# Altium PCB PCB+copy.pcbdoc
Units mil, origin at the board's own origin, x right, y up, seen from the top; angles counter-clockwise.
Board outline 5217.62 x 3650 mil, 2 copper layers (Top Layer, Bottom Layer); 35 components, 62 nets, 192 pads, 16 vias.
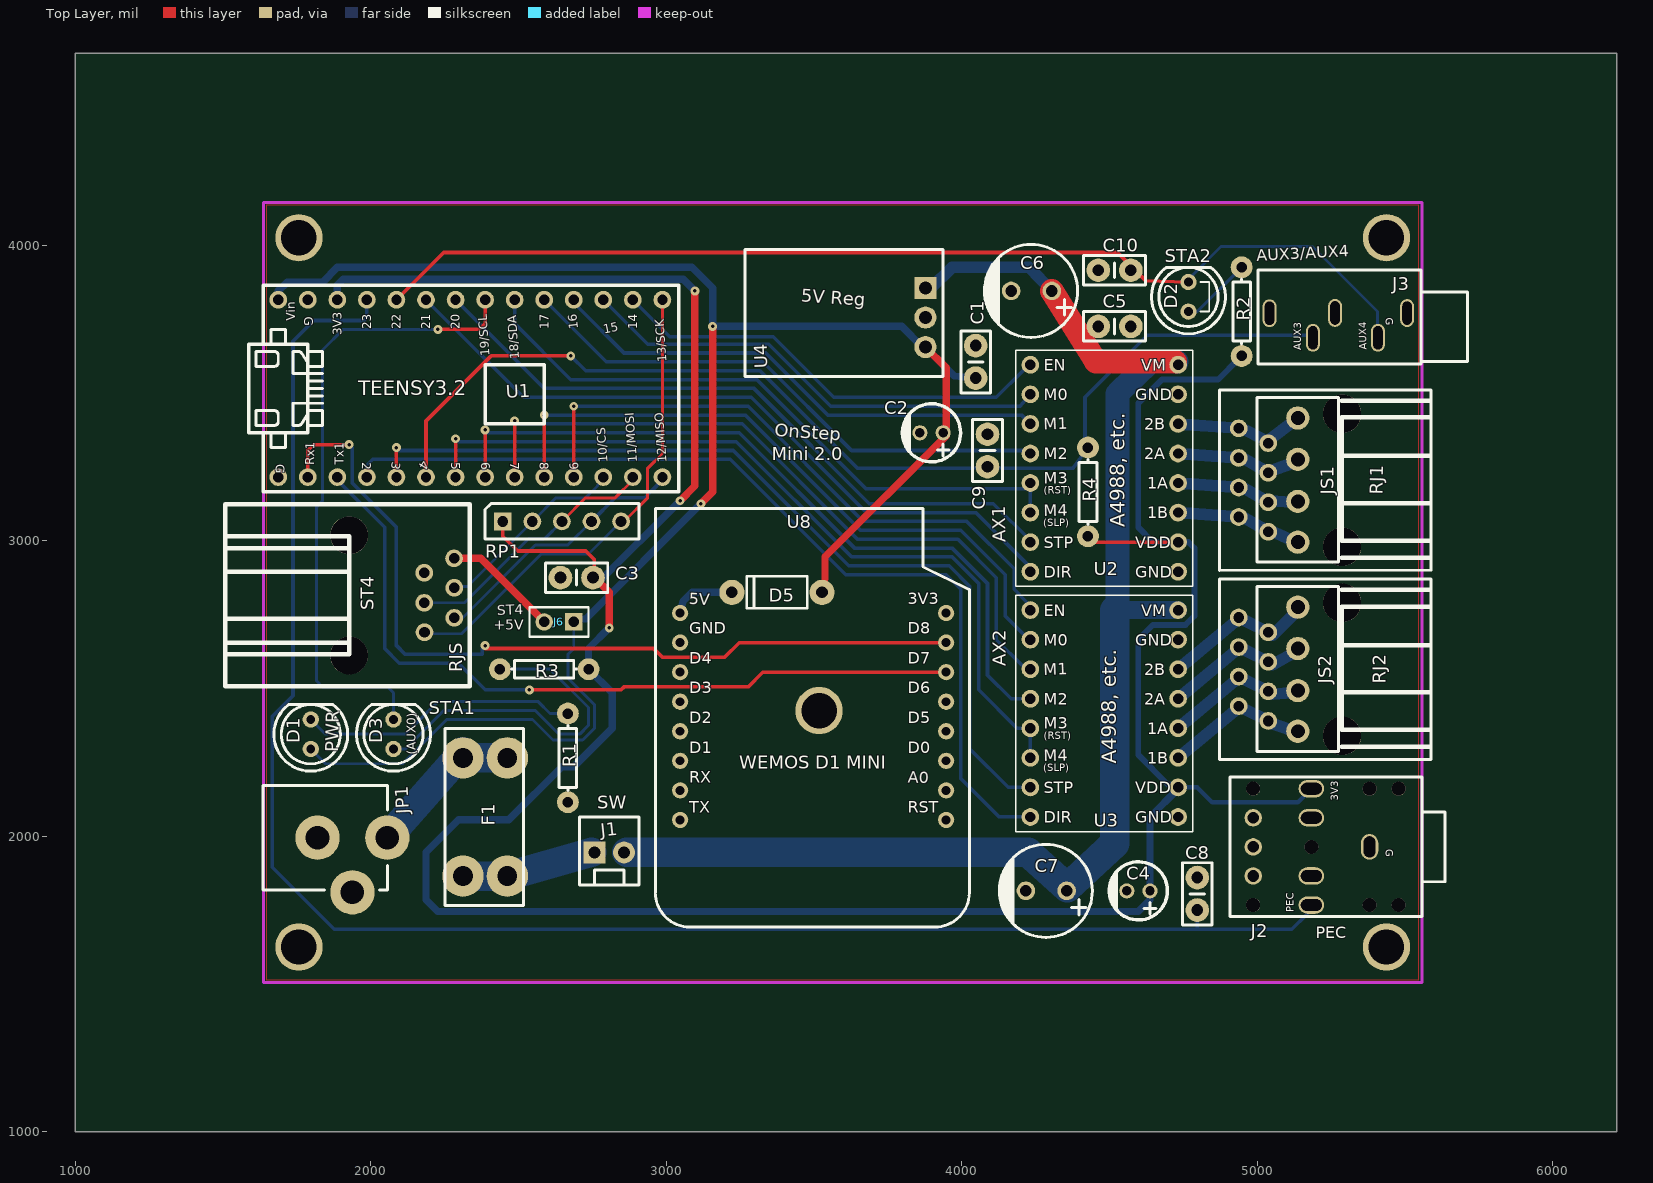
[diagram p0: Top Layer view]
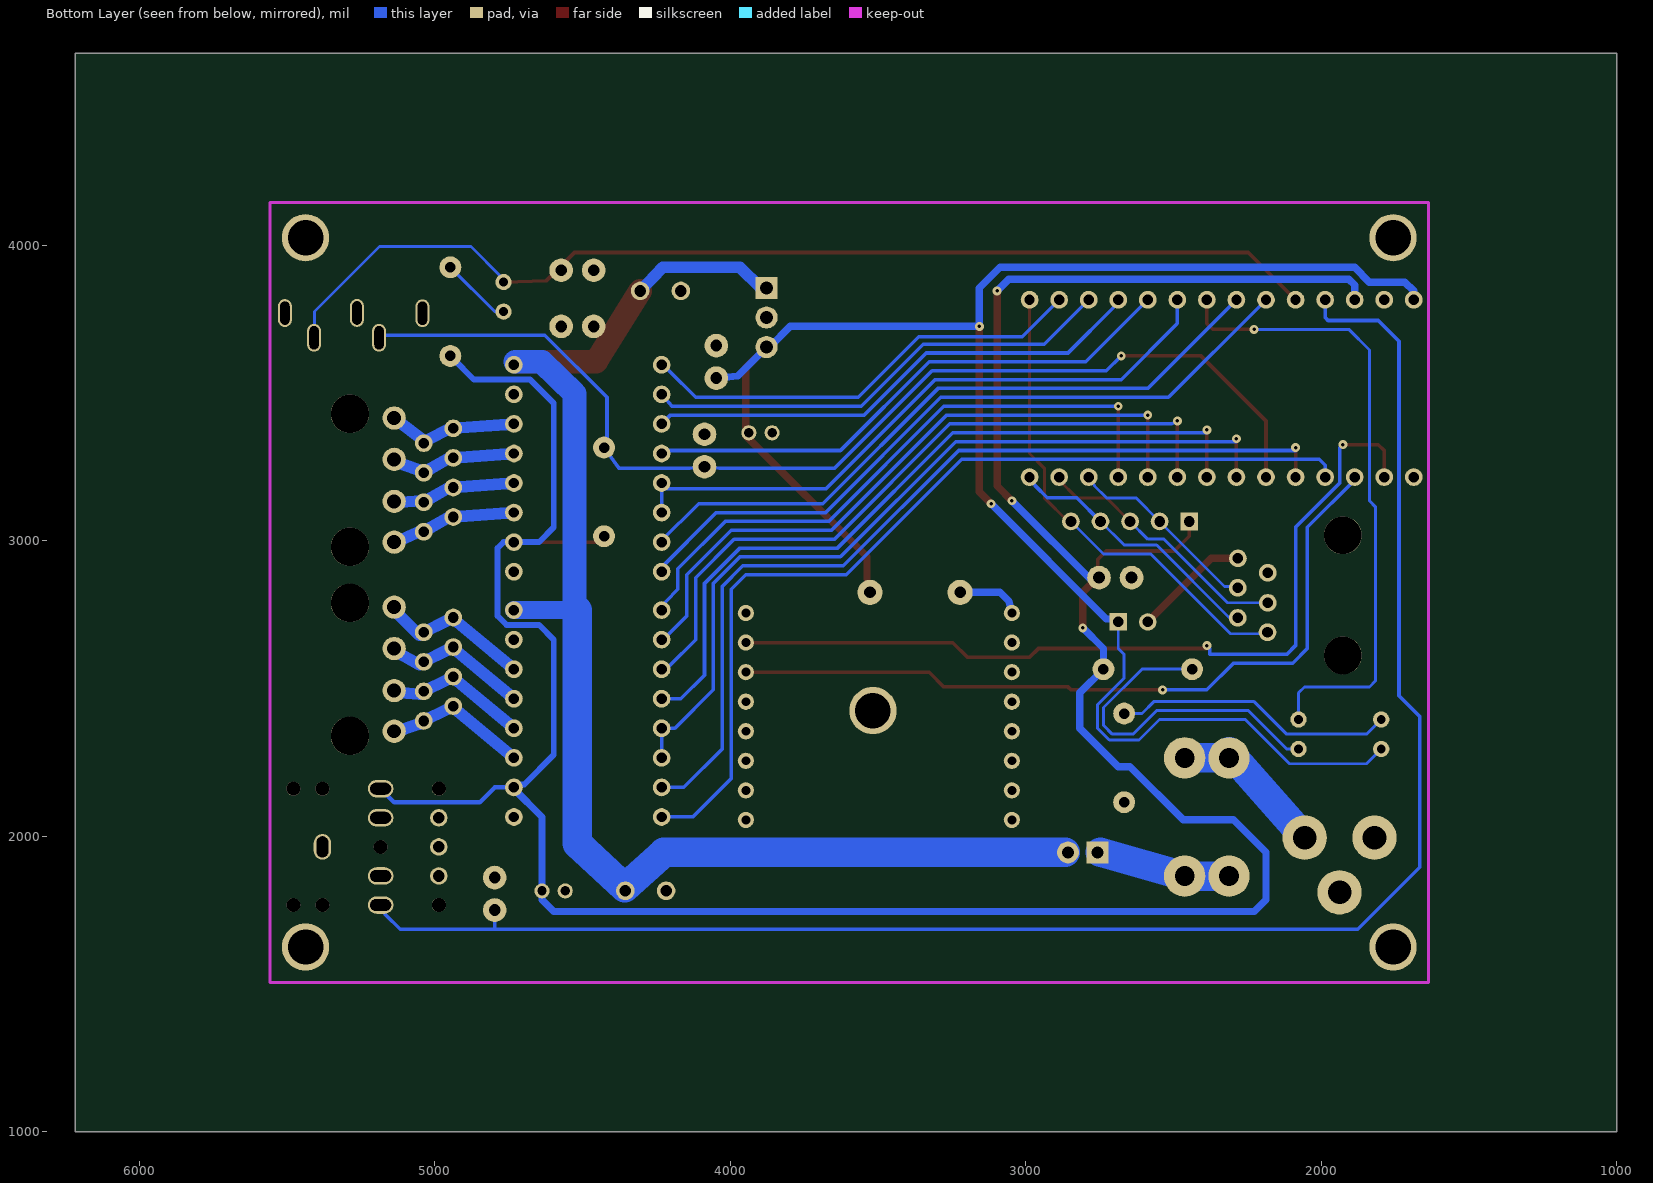
[diagram p1: Bottom Layer view, seen from below]

## Layer stack, top to bottom
Top Layer: signal copper (thickness not stored)
Dielectric: dielectric 12.6, FR-4, Dk 4.8
Bottom Layer: signal copper (thickness not stored)

## Board outline
6217.62,1000 1000,1000 1000,4650 6217.62,4650

## Components (designator, comment, footprint, x,y, rotation, side; value= is the part's Value field where it differs from the comment)
C1 "0.1UF-100V-20%(PTH)" CAP-PTH-SMALL-KIT 4047.62,3605 r90 top
C2 "47uF" CAP-D5.0XF2.0 3937.62,3365 r180 top
C3 "0.1UF-100V-20%(PTH)" CAP-PTH-SMALL-KIT 2697.62,2875 r180 top
C4 "47uF" CAP-D5.0XF2.0 4637.62,1815 r180 top
C5 "0.33UF-50V-20%(PTH)" CAP-PTH-SMALL-KIT 4517.62,3725 r0 top
C6 "100uF" CAP-D8.0XF3.5 4167.62,3845 r270 top
C7 "100uF" CAP-D8.0XF3.5 4217.62,1815 r270 top
C8 "0.1UF-100V-20%(PTH)" CAP-PTH-SMALL-KIT 4797.62,1805 r270 top
C9 "0.1UF-100V-20%(PTH)" CAP-PTH-SMALL-KIT 4087.62,3305 r90 top
C10 "0.1UF-100V-20%(PTH)" CAP-PTH-SMALL-KIT 4517.62,3915 r180 top
D1 "LED3/5mm" LED3/5MM 1797.72,2344.9 r90 top
D2 "LED3/5mm" LED3/5MM 4767.62,3824.9 r90 top
D3 "LED3/5mm" LED3/5MM 2077.62,2344.9 r90 top
D5 "1N4001" DO-41 3377.62,2825 r180 top
F1 "FUSE" FUSEHOLDER_MINI_BLADE 2387.62,2065 r270 top
J1 "MOLEX KK 1X2" "MOLEX KK 1X2" 2757.62,1945 r0 top
J2 "SJ-3566/3.5MM" "CUI SJ-3566" 5557.62,2200 r270 top
J3 "PJ-325M/3.5MM" AUDIO-PJ325 5507.62,3770 r270 top
J6 "1x2 Header" HDR1X2 2687.62,2725 r180 top
JP1 "POWER_JACKPTH" POWER_JACK_PTH 1517.62,1995 r270 top
JS1 "4POS_SCREW_TERMINAL_3.5MM" 4POS_SCREW_TERMINAL_3.5MM 5137.62,2995 r90 top
JS2 "4POS_SCREW_TERMINAL_3.5MM" 4POS_SCREW_TERMINAL_3.5MM 5137.62,2355 r90 top
R1 "4.7KΩ" AXIAL-0.3 2667.62,2415 r270 top
R2 "3.3KΩ(3302)" AXIAL-0.3 4947.62,3625 r90 top
R3 "3.3KΩ(3302)" AXIAL-0.3 2737.62,2565 r180 top
R4 "2k" AXIAL-0.3 4427.62,3315 r270 top
RJ1 "5555164-1" 5555164-1 4987.62,3204.95 r90 top
RJ2 "5555164-1" 5555164-1 4987.62,2564.95 r90 top
RJS "5555165-1" 6P6C 1927.62,2815 r270 top
RP1 "Bussed Resistor Network 5 Pin" "4 RESISTOR ARRAY" 2447.62,3065 r90 top
U1 "TEENSY_3.2_BASIC" TEENSY_3.2_BASIC 2287.62,3515 r0 top
U2 "A4988, etc." "GENERIC STEPPER MOTOR DRIVER CARRIER" 4177.62,2845 r0 top
U3 "A4988, etc." "GENERIC STEPPER MOTOR DRIVER CARRIER" 4177.62,2015 r0 top
U4 "5V Reg" "OKI78SR5/1.5W36C HOR" 3877.62,3755 r90 top
U8 "WEMOS D1 MINI" WEMOS_D1_MINI 3947.62,2755 r180 top

## Footprints (in the part's own frame and the unit in brackets; to place one, negate y for a bottom-side part, rotate by r counter-clockwise, add the part's x,y. Pads: shape width x height; smd on the part's side, far side on the other; paste and mask are expansions set on the pad)
"4 RESISTOR ARRAY" [mil]
  rect 60x60 hole 36: 1(0,0)
  round 60 hole 36: 2(0,-100) 3(0,-200) 4(0,-300) 5(0,-400)
  silkscreen extent -60,-460 60,60
4POS_SCREW_TERMINAL_3.5MM [mm]
  round 2 hole 1.2: 1(0,0) 2(3.5,0) 3(7.112,0) 4(10.668,0)
  silkscreen extent -1.72,-3.5 12.45,3.5
6P6C [mil]
  round 60 hole 36: 1(-125,355) 2(-76.2,254) 3(-25.4,355.6) 4(25.4,254) 5(76.2,355.6) 6(125,255)
  round 128 hole 128: ""(-203.2,0) ""(203.2,0)
  silkscreen extent -308,-420 308,408
5555164-1 [mil]
  round 60 hole 36: 1(-175,-49.95) 2(-125,49.95) 3(-75,-49.95) 4(-25,49.95) 5(25,-49.95) 6(75,49.95) 7(125,-49.95) 8(175,49.95)
  round 129.92 hole 129.92 unplated: ""(-225.6,-299.75) ""(224.4,-299.75)
  silkscreen extent -305,-600 305,115
AUDIO-PJ325 [mm]
  oval 2.4x1.2 hole 0.8 slot 1.999 at 0 deg: 1(0,0) 3(2.12,-8.103) 5(2.12,-2.515)
  oval 2.4x1.2 hole 0.8 slot 2.001 at 0 deg: 2(-0.012,-6.198) 4(0.014,-11.825)
  silkscreen extent -3.72,-12.81 4.38,5.21
AXIAL-0.3 [mil]
  round 74 hole 35.4: 1(0,0) 2(300,0)
  silkscreen extent 40,-30 260,30
CAP-D5.0XF2.0 [mm]
  round 1.3 hole 0.8: 1(0,0) 2(2,0)
  silkscreen extent -1.5,-2.5 3.5,2.5
CAP-D8.0XF3.5 [mm]
  round 1.6 hole 1: 1(0,3.5) 2(0,0)
  silkscreen extent -4,-2.29 4,5.71
CAP-PTH-SMALL-KIT [mil]
  round 80 hole 40: 1(-55,0) 2(55,0)
  silkscreen extent -105,-50 105,50
"CUI SJ-3566" [mm]
  oval 2.2x1.5 hole 1 slot 1.8 at 0 deg: 1(6,-4.5)
  oval 1.5x2.2 hole 1 slot 1.8 at 90 deg: 2(1,-9.5) 3(11,-9.5) 10(3.5,-9.5) 11(8.5,-9.5)
  round 1.5 hole 1: 4(8.5,-14.5) 5(6,-14.5) 6(3.5,-14.5)
  round 1.2 hole 1.2 unplated: ""(1,-2) ""(1,-4.5) ""(1,-14.5) ""(6,-9.5) ""(11,-2) ""(11,-4.5) ""(11,-14.5)
  silkscreen extent 0,-16.5 12,2
DO-41 [mil]
  round 85 hole 39.37: 1(-150,0) 2(155,0)
  silkscreen extent -100,-54 105,54
FUSEHOLDER_MINI_BLADE [mil]
  round 140 hole 67: 1(-200,-75) 1(-200,75) 2(200,-75) 2(200,75)
  silkscreen extent -300,-135 300,130
"GENERIC STEPPER MOTOR DRIVER CARRIER" [mil]
  round 60 hole 35: 1(55,750) 2(55,650) 3(55,550) 4(55,450) 5(55,350) 6(55,250) 7(55,150) 8(55,50) 9(555,50) 10(555,150) 11(555,250) 12(555,350) 13(555,450) 14(555,550) 15(555,650) 16(555,750)
  silkscreen extent 5,0 605,800
HDR1X2 [mil]
  rect 59x59 hole 36: 1(0,0)
  round 59 hole 36: 2(100,0)
  silkscreen extent -50,-50 150,50
LED3/5MM [mil]
  round 55 hole 30: 1(-50,0) 2(50,0)
  silkscreen extent -125,-125 100,125
"MOLEX KK 1X2" [mil]
  rect 74x74 hole 40: 1(0,0)
  round 74 hole 40: 2(100,0)
  silkscreen extent -50,-110 150,120
"OKI78SR5/1.5W36C HOR" [mil]
  rect 75x75 hole 44: 1(100,0)
  round 75 hole 44: 2(0,0) 3(-100,0)
  silkscreen extent -200,-60 230,610
POWER_JACK_PTH [mil]
  round 150 hole 80: GND(0,303) GNDBREAK(185,421) PWR(0,539)
  silkscreen extent -177,118 177,539
TEENSY_3.2_BASIC [mil]
  round 60 hole 35: 0RX(-500,-300) 1TX(-400,-300) 2(-300,-300) 3CANTX(-200,-300) 3V3_LO(-400,300) 4CANRX(-100,-300) 5(0,-300) 6(100,-300) 7(200,-300) 8(300,-300) 9CS(400,-300) 10CS(500,-300) 11MOSI(600,-300) 12MISO(700,-300) 13SCK(700,300) 14A0(600,300) 15A1(500,300) 16A2(400,300) 17A3(300,300) 18A4SDA(200,300) 19A5SCL(100,300) 20A6(0,300) 21A7(-100,300) 22A8(-200,300) 23A9(-300,300) AGND(-500,300) GND(-600,-300) VIN(-600,300)
  silkscreen extent -700,-350 755,350
WEMOS_D1_MINI [mil]
  round 55 hole 30: 1(0,700) 2(0,600) 3(0,500) 4(0,400) 5(0,300) 6(0,200) 7(0,100) 8(0,0) 9(900,0) 10(900,100) 11(900,200) 12(900,300) 13(900,400) 14(900,500) 15(900,600) 16(900,700)
  silkscreen extent -79,-354 984,1063

## Free pads (board coordinates)
  round 160 hole 120: GND(1757.62,1625) GND(1757.62,4025) GND(3517.62,2425) GND(5437.62,1625) GND(5437.62,4025)

## Via types
v1: diameter 30, hole 12, Top Layer to Bottom Layer, 16 vias

## Nets (pads, with @x,y where several pads share a name; then routed paths per layer and width w, separated by ;. In a path a pad name is that pad's centre, name@x,y a point inside that pad or via, vN(x,y) a via of type N, cw(c..) or ccw(c..) an arc to the next point about the centre after c; other vN are vias at no path point)
1A_1: JS1.2 RJ1.3 RJ1.4 U2.12 | length 426.2
  Bottom Layer w40: U2.12 RJ1.4 ; RJ1.4@4942.72,3185 RJ1.3@5047.62,3125 ; RJ1.3@5042.62,3135 JS1.2@5142.12,3127.9
1A_2: JS2.2 RJ2.3 RJ2.4 U3.12 | length 475.8
  Bottom Layer w40: U3.12 RJ2.4@4943.22,2539.9 ; RJ2.4@4947.72,2535 RJ2.3@5047.62,2485 ; RJ2.3@5052.12,2480.1 JS2.2@5142.12,2487.9
1B_1: JS1.1 RJ1.1 RJ1.2 U2.11 | length 435.7
  Bottom Layer w40: U2.11 RJ1.2 ; RJ1.2@4942.72,3085 RJ1.1@5047.62,3025 ; RJ1.1@5042.62,3035 JS1.1@5142.12,2990.1
1B_2: JS2.1 RJ2.1 RJ2.2 U3.11 | length 480.3
  Bottom Layer w40: U3.11 RJ2.2@4943.22,2439.9 ; RJ2.2@4947.72,2435 RJ2.1@5047.62,2385 ; RJ2.1@5052.12,2380.1 JS2.1@5142.12,2350.1
2A_1: JS1.3 RJ1.5 RJ1.6 U2.13 | length 432
  Bottom Layer w40: U2.13 RJ1.6 ; RJ1.6@4942.72,3285 RJ1.5@5047.62,3225 ; RJ1.5@5042.62,3235 JS1.3@5142.12,3270.1
2A_2: JS2.3 RJ2.5 RJ2.6 U3.13 | length 488.4
  Bottom Layer w40: U3.13 RJ2.6@4943.22,2639.9 ; RJ2.6@4947.72,2635 RJ2.5@5047.62,2585 ; RJ2.5@5052.12,2580.1 JS2.3@5142.12,2630.1
2B_1: JS1.4 RJ1.7 RJ1.8 U2.14 | length 442
  Bottom Layer w40: U2.14 RJ1.8 ; RJ1.8@4937.72,3385 RJ1.7@5037.62,3335 ; RJ1.7@5032.62,3335 JS1.4@5132.12,3410.1
2B_2: JS2.4 RJ2.7 RJ2.8 U3.14 | length 512.7
  Bottom Layer w40: U3.14 RJ2.8@4943.22,2739.9 ; RJ2.8@4947.72,2735 RJ2.7@5047.62,2685 ; RJ2.7@5052.12,2680.1 JS2.4@5142.12,2770.1
$BoardOutlineNet: 
+5V: C1.1 C2.1 D1.1 D5.1 J6.1 U1.VIN U4.3 | length 6414.1
  Top Layer w25: v1(3117.62,3125) 3157.62,3165 v1(3157.62,3725) ; D5.1@3532.62,2825 3537.62,2875 3537.62,2945 3947.62,3355 C2.1 3947.62,3385 3948.02,3584.6 U4.3
  Bottom Layer w10: D1.1@1797.62,2295 1847.62,2245 2107.92,2245 2257.52,2395 2547.62,2395 2617.62,2325 2717.62,2325 2757.62,2365 2757.62,2445 2667.62,2535 2667.62,2615 2687.62,2635 J6.1
  Bottom Layer w25: U1.VIN 1687.62,3845 1717.62,3875 1837.62,3875 1887.62,3925 3087.62,3925 3157.62,3855 v1(3157.62,3725) 3797.62,3725 3867.62,3655 3897.62,3655 3887.62,3645 3975.42,3557.2 C1.1 ; J6.1 2697.62,2735 2727.62,2735 v1(3117.62,3125)
AUX0: D3.2 U1.19A5SCL | length 2162.1
  Top Layer w12: v1(2227.62,3715) 2367.62,3715 2387.62,3735 U1.19A5SCL
  Bottom Layer w10: D3.2@2077.62,2395 2077.62,2485 2057.62,2505 1837.62,2505 1817.62,2525 1817.62,3115 1837.62,3135 1837.62,3645 1907.62,3715 v1(2227.62,3715)
AUX1: U1.18A4SDA U2.5 U2.6 | length 2177
  Bottom Layer w12: U1.18A4SDA 2487.62,3735 2677.62,3545 3307.62,3545 3677.62,3175 4232.62,3175 U2.5 U2.6
AUX2: U1.5 U3.5 U3.6 | length 2797.7
  Top Layer w12: U1.5 v1(2287.62,3345)
  Bottom Layer w12: v1(2287.62,3345) 2287.62,3335 3237.62,3335 3627.62,2945 3967.62,2945 4057.62,2855 4057.62,2495 4187.62,2365 U3.5 U3.6
AUX3: C9.1 J3.3 R4.1 U1.4CANRX | length 3746.2
  Top Layer w12: U1.4CANRX 2187.62,3405 2407.62,3625 v1(2677.62,3625)
  Bottom Layer w12: v1(2677.62,3625) 2727.62,3575 3317.62,3575 3647.62,3245 4037.62,3245 C9.1 4137.62,3245 4377.62,3245 R4.1 4417.62,3325 4417.62,3485 4627.62,3695 J3.3@5187.62,3695
AUX4: C10.1 D2.2 J3.5 U1.22A8 | length 3659.7
  Top Layer w12: U1.22A8 2247.62,3975 4527.62,3975 4623.82,3878.8 D2.2@4767.62,3875
  Bottom Layer w10: D2.2 4777.62,3895 4877.62,3995 5187.62,3995 5407.62,3775 J3.5@5407.62,3686.5
DE+: RJS.5 RP1.4 U1.12MISO | length 905.3
  Bottom Layer w10: RJS.5 2284.42,2740 2312.62,2740 2557.62,2985 2667.62,2985 RP1.4
  Bottom Layer w12: RP1.4 2827.62,3145 2927.62,3145 2967.62,3185 U1.12MISO
DE-: RJS.4 RP1.3 U1.11MOSI | length 887.9
  Top Layer w10: RP1.3 2727.62,3145 2827.62,3145 2887.62,3205 U1.11MOSI
  Bottom Layer w10: RJS.4 2317.62,2790 2532.62,3005 2587.62,3005 RP1.3
DIR1: U1.21A7 U2.8 | length 2441.1
  Bottom Layer w12: U1.21A7 2207.62,3795 2517.62,3485 3287.62,3485 3677.62,3095 4047.62,3095 4240.12,2902.5 U2.8
DIR2: U1.2 U3.8 | length 3169.4
  Bottom Layer w12: U1.2 1987.62,3255 2007.62,3275 3217.62,3275 3607.62,2885 3947.62,2885 3997.62,2835 3997.62,2195 4127.62,2065 U3.8
EN1: U1.14A0 U2.1 | length 1526
  Bottom Layer w12: U1.14A0 2907.62,3795 3012.62,3690 3362.62,3690 3567.62,3485 4117.62,3485 4207.62,3575 U2.1
EN2: U1.9CS U3.1 | length 2117.9
  Top Layer w12: U1.9CS v1(2687.62,3455)
  Bottom Layer w12: v1(2687.62,3455) 3277.62,3455 3667.62,3065 4017.62,3065 4177.62,2905 4177.62,2835 4217.62,2795 U3.1
F1_2: F1.2 J1.1 | length 441
  Bottom Layer w100: F1.2@2312.62,1865 F1.2@2457.62,1865 ; F1.2@2462.62,1865 J1.1@2747.62,1945
GND: C1.2 C2.2 C3.2 C4.2 C5.2 C6.2 C7.2 C8.1 C9.2 C10.2 J2.1 J3.1 JP1.GND JP1.GNDBREAK pad.GND R1.2 RJS.2 U1.AGND U1.GND U2.9 U2.15 U3.9 U3.15 U4.2 U8.10
J2_10: J2.10
J2_11: J2.11
J3_2: J3.2
J3_4: J3.4
JP1_PWR: F1.1 JP1.PWR | length 536.8
  Bottom Layer w100: JP1.PWR F1.1@2312.62,2285 ; F1.1@2317.62,2265 F1.1@2467.62,2265
M0_1: U1.15A1 U2.2 | length 1612.3
  Bottom Layer w12: U1.15A1 2937.62,3665 3347.62,3665 3557.62,3455 4197.62,3455 U2.2
M0_2: U1.8 U3.2 | length 2250.5
  Top Layer w12: U1.8 v1(2587.62,3425)
  Bottom Layer w12: v1(2587.62,3425) 3267.62,3425 3657.62,3035 3997.62,3035 4147.62,2885 4147.62,2745 4207.62,2685 U3.2
M1_1: U1.16A2 U2.3 | length 1722.8
  Bottom Layer w12: U1.16A2 2702.62,3790 2857.62,3635 3337.62,3635 3547.62,3425 4202.62,3425 U2.3
M1_2: U1.7 U3.3 | length 2402
  Top Layer w12: U1.7 v1(2487.62,3405)
  Bottom Layer w12: v1(2487.62,3405) 2507.62,3395 3257.62,3395 3647.62,3005 3987.62,3005 4117.62,2875 4117.62,2665 4207.62,2575 U3.3
M2_1: U1.17A3 U2.4 | length 1866.2
  Bottom Layer w12: U1.17A3 2607.62,3795 2797.62,3605 3327.62,3605 3627.62,3305 4232.62,3305 U2.4
M2_2: U1.6 U3.4 | length 2569.4
  Top Layer w12: U1.6 v1(2387.62,3375)
  Bottom Layer w12: v1(2387.62,3375) 2387.62,3365 3247.62,3365 3637.62,2975 3967.62,2975 4087.62,2855 4087.62,2545 4167.62,2465 U3.4
PEC: C8.2 J2.3 U1.23A9 | length 5853.7
  Bottom Layer w12: U1.23A9 1987.62,3755 1977.62,3745 1807.62,3745 1737.62,3675 1737.62,2475 1667.62,2405 1667.62,1895 1877.62,1685 5117.62,1685 5167.62,1735 J2.3 ; 4797.62,1686.8 C8.2@4797.62,1745
R1_1: D1.2 R1.1 | length 952.8
  Bottom Layer w10: D1.2@1797.62,2395 1847.62,2345 2117.62,2345 2227.62,2455 2567.62,2455 2607.62,2415 R1.1
R2_2: D2.1 R2.2 | length 242.1
  Bottom Layer w10: D2.1 4797.62,3775 R2.2
R3_2: D3.1 R3.2 | length 1173.2
  Bottom Layer w10: D3.1@2077.62,2295 2117.62,2295 2247.62,2425 2557.52,2425 2637.62,2345 2707.62,2345 2737.62,2375 2737.62,2435 2607.62,2565 R3.2
RA+: RJS.6 RP1.5 U1.13SCK | length 1638.3
  Top Layer w10: RP1.5 2857.62,3065 2937.62,3145 2937.62,3245 2987.62,3295 U1.13SCK
  Bottom Layer w10: RJS.6 2187.62,2685 2307.62,2685 2577.62,2955 2737.62,2955 RP1.5
RA-: RJS.3 RP1.2 U1.10CS | length 663.2
  Bottom Layer w10: RJS.3 2287.82,2845 2327.62,2845 RP1.2 2627.62,3145 2727.62,3145 2767.62,3185 U1.10CS
RJS_1: J6.2 RJS.1 | length 394.1
  Top Layer w25: RJS.1 2372.62,2940 J6.2
RX1: U1.0RX U8.7 | length 2924.3
  Top Layer w12: U1.0RX 1787.62,3305 1807.62,3325 v1(1927.62,3325) ; v1(2387.62,2645) 2387.62,2635 2957.62,2635 2987.62,2605 3197.62,2605 3247.62,2655 U8.7
  Bottom Layer w12: v1(1927.62,3325) 1937.62,3315 1937.62,3195 2087.62,3045 2087.62,2645 2117.62,2615 2377.62,2615 2377.62,2635 v1(2387.62,2645)
S$34: 
S$704: 
STP1: U1.20A6 U2.7 | length 2289.7
  Bottom Layer w12: U1.20A6 2307.62,3795 2587.62,3515 3297.62,3515 3687.62,3125 4107.62,3125 4235.12,2997.5 U2.7
STP2: U1.3CANTX U3.7 | length 3049.4
  Top Layer w12: U1.3CANTX v1(2087.62,3315)
  Bottom Layer w12: v1(2087.62,3315) 2087.62,3305 3227.62,3305 3617.62,2915 3957.62,2915 4027.62,2845 4027.62,2295 4157.62,2165 U3.7
TX1: U1.1TX U8.6 | length 2629.1
  Top Layer w12: v1(2537.62,2495) 2847.62,2495 2857.62,2505 3277.62,2505 3327.62,2555 U8.6
  Bottom Layer w12: U1.1TX 1887.62,3205 2047.62,3045 2047.62,2635 2097.62,2585 2297.62,2585 2387.62,2495 v1(2537.62,2495)
U8_1: U8.1
U8_2: U8.2
U8_3: U8.3
U8_4: U8.4
U8_5: U8.5
U8_8: U8.8
U8_9: D5.2 U8.9 | length 218.7
  Bottom Layer w25: U8.9 3057.32,2794.7 3087.62,2825 D5.2
U8_11: U8.11
U8_12: U8.12
U8_13: U8.13
U8_14: U8.14
U8_15: U8.15
U8_16: U8.16
VCC: C3.1 C4.1 J2.2 R2.1 R3.1 R4.2 RP1.1 U1.3V3_LO U2.10 U3.10 | length 10230.6
  Top Layer w12: RP1.1 2447.62,3015 2497.62,2965 2727.62,2965 2757.62,2935 2757.62,2860 C3.1@2752.62,2855 ; R4.2 4447.62,2995 U2.10
  Top Layer w25: C3.1 2757.62,2875 2807.62,2825 v1(2807.62,2705) ; v1(3047.62,3135) 3097.62,3185 v1(3097.62,3845)
  Bottom Layer w15: U3.10 4797.62,2165 4847.62,2115 5138.02,2115 J2.2
  Bottom Layer w20: U3.10@4732.62,2175 4697.62,2175 4597.62,2275 4597.62,2665 4647.62,2715 4757.62,2715 4787.62,2745 4787.62,2975 4767.62,2995 U2.10 4647.62,2995 4597.62,3045 4597.62,3465 4677.62,3545 4867.62,3545 R2.1@4937.62,3615
  Bottom Layer w25: U1.3V3_LO 1887.62,3865 1907.62,3885 3057.62,3885 v1(3097.62,3845) ; C3.1@2752.62,2855 2767.62,2855 v1(3047.62,3135) ; v1(2807.62,2705) 2737.62,2635 R3.1 2817.62,2485 2817.62,2365 2687.62,2235 2647.62,2235 2467.62,2055 2297.62,2055 2187.62,1945 2187.62,1785 2227.62,1745 4597.62,1745 4637.62,1785 C4.1 4637.62,2065 4732.62,2160 U3.10
VM: C5.1 C6.1 C7.1 J1.2 U2.16 U3.16 U4.1 | length 4758.4
  Top Layer w80: C6.1 4454.62,3605 U2.16@4722.62,3605
  Bottom Layer w40: U4.1@3897.62,3855 3967.62,3925 4228.72,3925 C6.1
  Bottom Layer w60: 4517.62,2765 U3.16
  Bottom Layer w80: 4527.62,2765 4527.62,3497.4 4637.42,3605 U2.16@4727.62,3605
  Bottom Layer w100: J1.2@2867.62,1945 4225.42,1945 4357.62,1825 4517.62,1975.2 4517.62,2765
pads on no net: J2. J2.4 J2.5 J2.6 RJ1. RJ2. RJS.

## Polygon pours and split planes (outlines as drawn)
GND on Top Layer (solid): 1647.62,4135 1647.62,1515 5547.62,1515 5547.62,4135

## Other copper
Top Layer:
  pour cut-out: 2277.62,2385 2557.62,2385 2557.62,2175 2357.62,2175 2062.62,1840 1907.62,1985

## Silkscreen, mask and mechanical layers (free items; w line width, h text height)
Top Overlay:
  lines w6 net S$704: 4807.62,3775 4837.62,3775 4837.62,3875 4807.62,3875
  text "AUX3/AUX4" at 4998.67,3945.03 h40 r3
  text "STA2" at 4687.62,3942.5 h45
  text "G" at 5435.12,3755 h25 r270
  text "AUX3" at 5150.12,3645 h25 r90
  text "AUX4" at 5370.12,3645.22 h25 r91
  text "OnStep" at 3366.05,3352.55 h45 r356
  text "Mini 2.0" at 3357.62,3272.5 h45
  text "AX1" at 4150.12,2995.39 h45 r91
  text "ST4" at 2010.12,2765 h45 r90
  text "ST4" at 2428.23,2747.51 h35 r2
  text "+5V" at 2417.62,2698.4 h35
  text "AX2" at 4150.12,2575 h45 r90
  text "STA1" at 2197.62,2412.5 h45
  text "PWR" at 1890.12,2284.61 h45 r89
  text "(AUX0)" at 2152.62,2275 h30 r90
  text "3V3" at 5273.71,2120 h25 r90
  text "SW" at 2767.62,2092.5 h45
  text "G" at 5435.12,1955 h25 r270
  text "PEC" at 5123.71,1742.3 h25 r90
  text "PEC" at 5197.62,1655 h40

## Text inside footprints (layer, text, board x,y; h text height)
U1: Top Overlay "TEENSY3.2" at 1957.62,3492.68 h50; Top Overlay "Rx1" at 1810.02,3255.84 h30 r89; Top Overlay "Tx1" at 1910.02,3256.1 h30 r90; Top Overlay "12/MISO" at 3002.58,3266.05 h30 r94; Top Overlay "11/MOSI" at 2902.58,3266.05 h30 r94; Top Overlay "10/CS" at 2802.58,3266.05 h30 r94; Top Overlay "9" at 2672.7,3263.43 h30 r276; Top Overlay "8" at 2572.62,3265 h30 r270; Top Overlay "7" at 2472.62,3265 h30 r270; Top Overlay "6" at 2372.7,3263.43 h30 r276; Top Overlay "5" at 2272.62,3265 h30 r270; Top Overlay "4" at 2174.9,3272.95 h30 r238; Top Overlay "3" at 2072.9,3267.86 h30 r259; Top Overlay "2" at 1972.62,3265.26 h30 r269; Top Overlay "G" at 1679.02,3258.1 h30 r270; Top Overlay "G" at 1776.02,3757.5 h30 r270; Top Overlay "Vin" at 1744.32,3743.76 h30 r91; Top Overlay "3V3" at 1903.02,3695 h30 r90; Top Overlay "23" at 2002.62,3715 h30 r90; Top Overlay "22" at 2102.62,3715 h30 r90; Top Overlay "20" at 2302.62,3715 h30 r90; Top Overlay "21" at 2202.62,3715 h30 r90; Top Overlay "19/SCL" at 2402.58,3626.05 h30 r94; Top Overlay "18/SDA" at 2502.58,3616.05 h30 r94; Top Overlay "15" at 2790.48,3700.28 h30 r11; Top Overlay "16" at 2702.54,3716.57 h30 r96; Top Overlay "17" at 2602.62,3715 h30 r90; Top Overlay "14" at 2902.62,3715 h30 r90; Top Overlay "13/SCK" at 3002.58,3606.05 h30 r94
U2: Top Overlay "M0" at 4277.62,3475 h40; Top Overlay "M1" at 4278.32,3375.01 h40 r2; Top Overlay "M2" at 4277.62,3275 h40; Top Overlay "STP" at 4277.62,2975 h40; Top Overlay "DIR" at 4277.62,2875 h40; Top Overlay "GND" at 4587.62,2875 h40; Top Overlay "VDD" at 4587.62,2975 h40; Top Overlay "1B" at 4627.62,3075 h40; Top Overlay "1A" at 4627.62,3175 h40; Top Overlay "2A" at 4617.62,3275 h40; Top Overlay "2B" at 4617.62,3375 h40; Top Overlay "GND" at 4587.62,3475 h40; Top Overlay "VM" at 4607.62,3575 h40; Top Overlay "EN" at 4277.62,3575 h40; Top Overlay "(RST)" at 4277.62,3158.3 h25; Top Overlay "(SLP)" at 4276.62,3049.3 h25; Top Overlay "M3" at 4277.62,3193.2 h40; Top Overlay "M4" at 4277.97,3083.2 h40 r1
U3: Top Overlay "M0" at 4277.62,2645 h40; Top Overlay "M1" at 4278.32,2545.01 h40 r2; Top Overlay "M2" at 4277.62,2445 h40; Top Overlay "STP" at 4277.62,2145 h40; Top Overlay "DIR" at 4277.62,2045 h40; Top Overlay "GND" at 4587.62,2045 h40; Top Overlay "VDD" at 4587.62,2145 h40; Top Overlay "1B" at 4627.62,2245 h40; Top Overlay "1A" at 4627.62,2345 h40; Top Overlay "2A" at 4617.62,2445 h40; Top Overlay "2B" at 4617.62,2545 h40; Top Overlay "GND" at 4587.62,2645 h40; Top Overlay "VM" at 4607.62,2745 h40; Top Overlay "EN" at 4277.62,2745 h40; Top Overlay "(RST)" at 4277.62,2328.3 h25; Top Overlay "(SLP)" at 4276.62,2219.3 h25; Top Overlay "M3" at 4277.62,2363.2 h40; Top Overlay "M4" at 4277.97,2253.2 h40 r1
U8: Top Overlay "3V3" at 3817.62,2785.32 h39.37; Top Overlay "D8" at 3817.62,2684.53 h39.37; Top Overlay "D7" at 3817.62,2583.74 h39.37; Top Overlay "D6" at 3817.62,2482.93 h39.37; Top Overlay "D5" at 3817.72,2382.24 h39.37; Top Overlay "D0" at 3817.62,2281.43 h39.37; Top Overlay "A0" at 3816.93,2180.65 h39.37 r358; Top Overlay "RST" at 3817.62,2079.8 h39.37; Top Overlay "5V" at 3076.59,2785.34 h39.37 r357; Top Overlay "GND" at 3077.62,2685.32 h39.37; Top Overlay "D4" at 3077.62,2583.74 h39.37; Top Overlay "D3" at 3077.62,2482.95 h39.37; Top Overlay "D2" at 3077.62,2382.16 h39.37; Top Overlay "D1" at 3077.62,2281.38 h39.37; Top Overlay "RX" at 3077.62,2180.59 h39.37; Top Overlay "TX" at 3077.62,2079.8 h39.37